# Altium PCB BEAR4.PcbDoc (part 3 of 3)
Units mm, origin at the board's own origin, x right, y up, seen from the top; angles counter-clockwise.
Board outline 83.43 x 40.25 mm, 4 copper layers (Top Layer, Layer 1, Layer 2, Bottom Layer), stack 0.8 mm thick; 156 components, 110 nets, 501 pads, 382 vias.
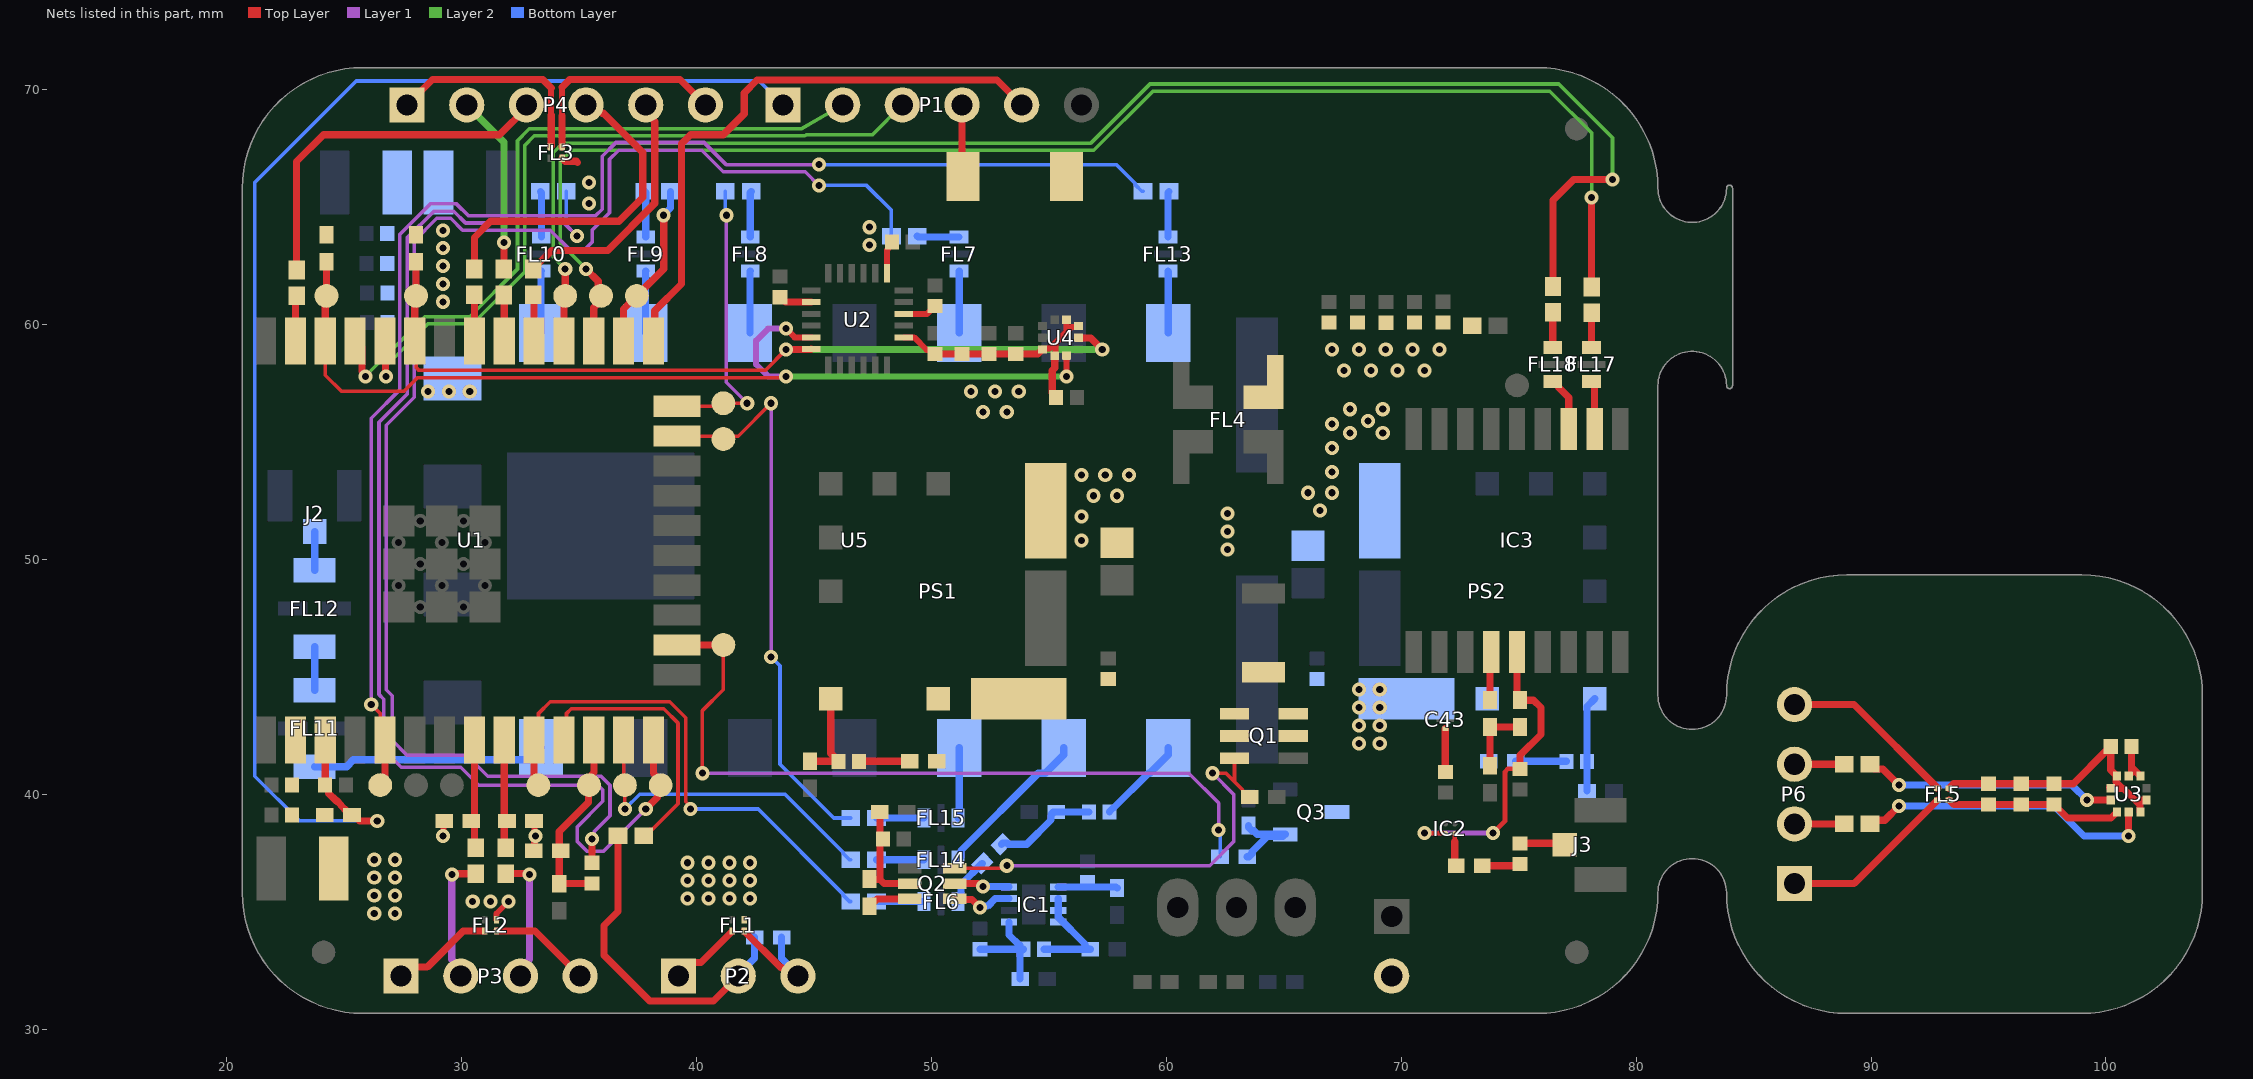
[diagram p4: the nets of this part, all layers, seen from the top]

## Via types
v1: diameter 0.6, hole 0.3, Top Layer to Bottom Layer, tented both sides, 382 vias

## Nets (pads, with @x,y where several pads share a name; then routed paths per layer and width w, separated by ;. In a path a pad name is that pad's centre, name@x,y a point inside that pad or via, vN(x,y) a via of type N, cw(c..) or ccw(c..) an arc to the next point about the centre after c; other vN are vias at no path point) (continued)
HEATER: R10.1 TP13.1 U1.16 | length 32.6
  Top Layer w0.152: v1(40.259,40.894) 40.259,43.561 41.148,44.45 TP13.1@41.148,46.355
  Top Layer w0.305: U1.16@39.174,46.355 TP13.1@41.148,46.355
  Layer 1 w0.152: v1(40.259,40.894) 60.96,40.894 62.23,39.624 v1(62.23,38.481)
  Bottom Layer w0.152: v1(62.23,38.481) 62.29,38.421 R10.1@62.29,37.338
I2C2_SCL: FB3.1 R26.1 U1.9 | length 4.6
  Top Layer w0.305: FB3.1@31.824,37.719 U1.9@31.824,42.3
I2C2_SCL_FILT: FB3.2 P3.3 | length 5.5
  Top Layer w0.305: FB3.2@31.877,36.619 32.85,36.619 v1(32.893,36.576)
  Layer 1 w0.305: P3.3@32.512,32.258 32.512,32.581 32.893,32.962 v1(32.893,36.576)
I2C2_SDA: FB2.1 R25.1 U1.8 | length 4.6
  Top Layer w0.305: FB2.1@30.554,37.718 U1.8@30.554,42.3
I2C2_SDA_FILT: FB2.2 P3.2 | length 5.5
  Top Layer w0.305: v1(29.591,36.576) 29.633,36.618 FB2.2@30.608,36.618
  Layer 1 w0.305: v1(29.591,36.576) 29.591,32.962 29.972,32.581 P3.2@29.972,32.258
I2C_SCL: R2.1 TP15.1 U1.36 U2.23 U4.2 | length 43
  Top Layer w0.152: U1.36@24.204,59.3 24.204,57.838 24.892,57.15 27.559,57.15 28.143,57.734 43.764,57.734 v1(43.815,57.785)
  Top Layer w0.254: v1(43.815,59.817) 44.184,59.448 U2.23@44.893,59.448 ; v1(55.753,57.785) U4.2@55.753,58.668
  Top Layer w0.305: U1.36@24.204,59.3 24.204,61.161 TP15.1@24.257,61.214 R2.1@24.257,62.671
  Layer 1 w0.254: v1(43.815,57.785) 43.053,57.785 42.545,58.293 42.545,59.309 43.053,59.817 v1(43.815,59.817)
  Layer 2 w0.254: v1(43.815,57.785) v1(55.753,57.785)
I2C_SDA: R1.1 TP14.1 U1.33 U2.24 U4.4 | length 36.5
  Top Layer w0.152: U1.33@28.014,59.3 28.072,59.242 28.072,58.161 28.194,58.039 42.926,58.039 v1(43.815,58.928)
  Top Layer w0.305: U1.33@28.014,59.3 28.014,61.161 TP14.1@28.067,61.214 R1.1@28.067,62.671 ; v1(43.815,58.928) 44.873,58.928 U2.24@44.893,58.948 ; U4.4@56.268,59.433 56.288,59.413 56.792,59.413 v1(57.277,58.928)
  Layer 2 w0.305: v1(43.815,58.928) v1(57.277,58.928)
LNA_EN: IC3.13 R22.2 | length 2.1
  Top Layer w0.305: R22.2@73.787,44.009 73.787,46.007 IC3.13@73.83,46.05
LNA_VCC: C41.2 IC2.A1 IC3.14 R23.1 | length 13.4
  Top Layer w0.203: v1(70.993,38.354) 71.012,38.335 IC2.A1@71.882,38.335 ; v1(73.914,38.354) 74.422,38.862 74.422,40.961 74.541,41.08 C41.2@75.057,41.08
  Top Layer w0.305: IC3.14@74.93,46.05 74.93,44.085 75.016,43.998 75.636,43.998 75.946,43.688 75.946,42.545 75.057,41.656 C41.2@75.057,41.08
  Layer 1 w0.203: v1(70.993,38.354) v1(73.914,38.354)
NetC6_1: C6.1 IC1.1 R6.1 | length 2.5
  Bottom Layer w0.305: IC1.1@55.406,36.056 57.864,36.056 R6.1@57.912,36.008
NetC7_1: C7.1 C9.2 IC1.5 R11.2 | length 4.4
  Bottom Layer w0.305: C9.2@52.07,33.401 C7.1@53.916,33.401 53.781,33.266 R11.2@53.781,32.131 ; IC1.5@53.306,34.556 53.306,34.011 53.748,33.569 C7.1@53.768,33.569
NetC7_2: C7.2 IC1.2 IC1.3 IC1.4 R7.2 | length 4.7
  Bottom Layer w0.305: C7.2@54.796,33.401 R7.2@56.694,33.401 ; IC1.2@55.406,35.556 IC1.3@55.406,35.056 55.406,34.764 56.546,33.624 56.546,33.549 R7.2@56.694,33.401 ; R7.2@56.769,33.401 R7.2@56.694,33.401
NetC8_2: C8.2 Q2.2 R9.1 R12.1 | length 4.6
  Top Layer w0.305: R9.1@47.386,36.374 47.812,36.374 ; R12.1@47.812,39.243 47.812,36.374 ; Q2.2@49.088,36.195 47.991,36.195 47.812,36.374
NetC12_1: C12.1 R15.2 | length 2.2
  Top Layer w0.305: C12.1@46.922,41.402 R15.2@49.082,41.402
NetC12_2: C12.2 PS1.6 R13.2 | length 4
  Top Layer w0.305: R13.2@44.831,41.402 C12.2@46.042,41.402 46.042,41.422 45.717,41.747 PS1.6@45.717,44.066
NetC15_1: C15.1 R21.2 | length 2.2
  Bottom Layer w0.305: R21.2@74.87,41.402 C15.1@77.03,41.402
NetC15_2: C15.2 PS2.6 R20.1 | length 4.1
  Bottom Layer w0.305: R20.1@77.911,40.132 77.911,41.401 C15.2@77.91,41.402 77.91,43.74 PS2.6@78.238,44.068
NetC22_2: C22.2 U2.10 | length 1.5
  Top Layer w0.254: U2.10@48.833,60.448 49.823,60.448 49.972,60.597 49.972,60.601 50.145,60.774 C22.2@50.165,60.774
NetC23_2: C23.2 U2.20 | length 1.4
  Top Layer w0.305: C23.2@43.561,61.155 43.581,61.155 43.788,60.948 U2.20@44.893,60.948
NetC34_1: C34.1 U5.18 | length 3.8
  Bottom Layer w0.305: C34.1@57.59,39.243 57.59,39.263 57.738,39.411 57.758,39.411 59.239,40.892 59.298,40.892 60.086,41.68 U5.18@60.086,41.975
NetC34_2: C34.2 R28.2 R29.2 | length 4.5
  Bottom Layer w0.305: R28.2@52.985,37.872 53.038,37.925 53.246,37.925 53.299,37.872 54.061,37.872 55.089,38.9 55.089,39.095 55.237,39.243 R29.2@55.312,39.243 C34.2@56.71,39.243 ; R29.2@55.118,39.183 R29.2@55.178,39.243
NetC40_1: C40.1 J3.1 | length 1.9
  Top Layer w0.318: C40.1@75.057,37.905 76.902,37.905 J3.1@76.961,37.846
NetC40_2: C40.2 L1.2 | length 1.6
  Top Layer w0.318: L1.2@73.448,36.957 74.989,36.957 C40.2@75.057,37.025
NetC42_1: C42.1 C43.1 | length 1.8
  Top Layer w0.318: C42.1@71.882,40.953 C43.1@71.882,42.785
NetF1_1: F1.1 Q1.1 Q1.2 Q1.5 Q1.6
NetFL1_1: FL1.1 P2.1 | length 3.1
  Top Layer w0.305: P2.1@39.243,32.258 39.826,32.841 40.197,32.841 FL1.1@41.533,34.177
NetFL1_2: FL1.2 P2.3 R5.1 | length 5
  Top Layer w0.305: FL1.2@42.033,34.177 43.589,32.621 43.636,32.621 44,32.258 P2.3@44.323,32.258
  Bottom Layer w0.305: R5.1@43.628,33.909 43.628,33.018 44.323,32.323 P2.3@44.323,32.258
NetFL2_1: FL2.1 P3.1 | length 4.4
  Top Layer w0.305: P3.1@27.432,32.258 27.813,32.639 28.541,32.639 30.079,34.177 FL2.1@30.992,34.177
NetFL2_2: FL2.2 P3.4 | length 4.4
  Top Layer w0.305: FL2.2@31.492,34.177 33.133,34.177 P3.4@35.052,32.258
NetFL3_1: FL3.1 P4.6 | length 9.2
  Top Layer w0.254: 34.278,68.878 34.278,69.282 ; 34.278,69.283 ccw(c34.024,69.282) 34.278,69.295 cw(c35.306,69.342) 34.278,69.391 ccw(c34.024,69.402) 34.278,69.402 34.278,70.092
  Top Layer w0.305: FL3.1@34.278,67.558 34.278,68.878 ; 34.278,70.092 34.611,70.425 39.303,70.425 39.392,70.336 P4.6@40.386,69.342
NetFL3_2: FL3.2 P4.1 | length 9.3
  Top Layer w0.254: 33.821,68.905 33.821,70.065
  Top Layer w0.305: P4.1@27.686,69.342 28.769,70.425 33.461,70.425 33.821,70.065 ; FL3.2@33.786,67.55 33.821,67.585 33.821,68.905
NetFL5_1: FL5.1 P6.4 | length 7.6
  Top Layer w0.305: P6.4@86.741,43.815 89.273,43.815 FL5.1@92.837,40.251
NetFL5_2: FL5.2 P6.1 | length 7.6
  Top Layer w0.305: P6.1@86.741,36.195 89.281,36.195 FL5.2@92.837,39.751
NetFL11_1: FL11.1 U5.12 | length 10
  Bottom Layer w0.318: FL11.1@23.749,41.174 25.116,41.174 25.401,41.459 32.87,41.459 U5.12@33.386,41.975
NetFL11_3: FL11.3 FL12.1 | length 1.9
  Bottom Layer w0.318: FL11.3@23.749,44.424 FL12.1@23.749,46.28
NetFL12_3: FL12.3 J2.1 | length 1.7
  Bottom Layer w0.318: FL12.3@23.749,49.53 J2.1@23.749,51.181
NetIC1_7: IC1.7 Q2.4 | length 2.6
  Top Layer w0.305: Q2.4@50.988,35.545 51.011,35.522 51.727,35.522 v1(52.07,35.179)
  Bottom Layer w0.305: v1(52.07,35.179) 52.126,35.235 52.398,35.235 52.718,35.556 IC1.7@53.306,35.556
NetIC1_8: IC1.8 Q2.5 | length 2.4
  Top Layer w0.305: Q2.5@50.988,36.195 51.99,36.195 52.117,36.068 v1(52.197,36.068)
  Bottom Layer w0.305: v1(52.197,36.068) 53.006,36.068 53.016,36.058 53.304,36.058 IC1.8@53.306,36.056
NetIC2_B1: IC2.B1 L1.1 | length 1.4
  Top Layer w0.203: 72.282,37.973 IC2.B1@72.282,38.335
  Top Layer w0.318: 72.282,37.973 72.282,37.023 L1.1@72.348,36.957
NetP5_2: P5.2 Q3.3
NetQ1_3: Q1.3 Q2.6 R8.2 | length 18.7
  Top Layer w0.152: Q2.6@50.988,36.845 52.98,36.845 53.092,36.957 v1(53.213,36.957) ; v1(61.976,40.894) 62.544,40.894 62.905,40.533 ; Q1.3@62.905,41.529 62.905,40.533 ; R8.2@63.56,39.878 63.485,39.878 63.261,40.102 63.261,40.177 62.905,40.533
  Layer 1 w0.152: v1(53.213,36.957) 61.849,36.957 62.865,37.973 62.865,40.005 v1(61.976,40.894)
NetQ2_3: Q2.3 R9.2 | length 1.9
  Top Layer w0.305: R9.2@47.371,35.239 47.371,35.314 47.519,35.462 47.614,35.462 47.697,35.545 Q2.3@49.088,35.545
NetQ3_1: Q3.1 R10.2 R14.1 | length 3.8
  Bottom Layer w0.305: R10.2@63.44,37.338 63.515,37.338 63.663,37.486 63.663,37.561 64.3,38.198 64.972,38.198 Q3.1@65.067,38.293 63.875,38.293 63.723,38.445 63.648,38.445 63.5,38.593 R14.1@63.5,38.668
NetR22_1: R22.1 R23.2 R24.2 | length 2.9
  Top Layer w0.305: R24.2@73.787,41.215 R22.1@73.787,42.859 R23.2@75.057,42.859
ONEWIRE: FB1.1 U1.11 | length 11.7
  Top Layer w0.152: U1.11@34.364,42.3 34.473,42.409 34.473,43.439 34.671,43.637 38.61,43.637 39.218,43.03 39.218,39.599 38.12,38.501 38.035,38.501 FB1.1@37.761,38.227
ONEWIRE_FILT: FB1.2 P2.2 R5.2 | length 14.2
  Top Layer w0.305: 36.067,34.164 36.067,34.416 36.661,35.01 FB1.2@36.661,38.227 ; 36.068,34.163 36.068,33.147 38.012,31.203 40.728,31.203 P2.2@41.783,32.258
  Bottom Layer w0.305: P2.2@41.783,32.258 41.783,32.323 42.478,33.018 R5.2@42.478,33.909
PGM_DTR: P1.5 U1.25 | length 25.4
  Top Layer w0.305: U1.25@38.174,59.3 38.227,59.353 38.227,60.579 39.37,61.722 39.37,67.691 39.751,68.072 41.148,68.072 42.037,68.961 42.037,69.85 42.584,70.397 52.793,70.397 P1.5@53.848,69.342
PGM_RTS: C5.2 P1.1 R27.2 U1.3 | length 60.9
  Top Layer w0.305: U1.3@24.204,42.3 24.204,40.392 C5.2@24.198,40.386 24.346,40.238 24.346,40.043 24.668,39.721 24.691,39.721 24.87,39.542 24.87,39.519 25.117,39.272 25.117,39.264 25.265,39.116 25.415,39.116 25.669,38.862 v1(26.416,38.862)
  Bottom Layer w0.152: v1(26.416,38.862) 23.114,38.862 21.209,40.767 21.209,66.04 25.527,70.358 42.672,70.358 P1.1@43.688,69.342
PGM_RX: P1.3 U1.34 | length 31.7
  Top Layer w0.305: U1.34@26.744,59.3 26.769,59.275 26.769,57.813 v1(26.797,57.785)
  Layer 2 w0.152: v1(26.797,57.785) 26.797,58.243 28.574,60.02 30.479,60.02 32.69,62.231 32.69,67.615 33.096,68.021 44.622,68.021 44.672,68.072 47.498,68.072 P1.3@48.768,69.342
PGM_TX: P1.2 U1.35 | length 29.9
  Top Layer w0.305: U1.35@25.474,59.3 25.772,59.002 25.772,58.001 25.908,57.865 v1(25.908,57.785)
  Layer 2 w0.152: v1(25.908,57.785) 28.448,60.325 30.353,60.325 32.385,62.357 32.385,67.818 32.848,68.281 32.893,68.326 44.468,68.326 P1.2@46.228,69.342
RAD_3V3: C14.2 C28.2 C29.2 C30.2 C31.2 C32.1 C33.1 PS2.4 PS2.5 R21.1 U5.8
  other v1: 68.199,42.164 69.088,42.164 68.199,42.926 69.088,42.926 68.199,43.688 69.088,43.688 68.199,44.45 69.088,44.45 28.575,57.15 29.464,57.15 30.353,57.15 29.21,60.96 29.21,61.722 29.21,62.484 29.21,63.246 29.21,63.987
RAD_EN: FB13.1 TP2.1 U1.26 | length 7.2
  Top Layer w0.305: U1.26@36.904,59.3 36.904,60.653 TP2.1@37.465,61.214 38.608,62.357 v1(38.608,64.643)
  Bottom Layer w0.305: v1(38.608,64.643) 38.608,64.662 38.904,64.958 FB13.1@38.904,65.659
RAD_EN_FILT: FB13.2 FL9.1 | length 2
  Bottom Layer w0.305: FB13.2@37.804,65.659 37.846,65.617 FL9.1@37.846,63.717
RAD_EN_FILT2: FL9.3 U5.6 | length 2.6
  Bottom Layer w0.305: U5.6@37.836,59.625 37.836,62.257 FL9.3@37.846,62.267
RAD_PTT: FB12.1 TP1.1 U1.24 | length 12.4
  Top Layer w0.152: U1.24@39.174,56.515 41.021,56.515 TP1.1@41.148,56.642 v1(42.164,56.642)
  Layer 1 w0.152: v1(41.275,64.643) 41.275,57.531 v1(42.164,56.642)
  Bottom Layer w0.152: FB12.1@41.233,65.659 41.233,64.685 v1(41.275,64.643)
RAD_PTT_FILT: FB12.2 FL8.1 | length 2
  Bottom Layer w0.305: FL8.1@42.291,63.717 42.291,65.617 FB12.2@42.333,65.659
RAD_PTT_FILT2: FL8.3 U5.5 | length 2.6
  Bottom Layer w0.305: U5.5@42.286,59.625 42.286,62.262 FL8.3@42.291,62.267
RAD_PW: FB14.1 TP3.1 U1.14 | length 52.5
  Top Layer w0.305: v1(37.846,39.37) 38.345,39.869 38.345,40.25 TP3.1@38.481,40.386 38.481,40.578 38.174,40.885 U1.14@38.174,42.3
  Layer 1 w0.152: v1(34.925,63.754) 34.366,64.313 30.175,64.313 29.667,64.821 28.83,64.821 27.686,63.677 27.686,57.023 26.492,55.829 26.492,44.247 26.691,44.048 26.691,41.889 27.432,41.148 29.972,41.148 30.734,40.386 35.814,40.386 36.017,40.183 36.017,39.7 34.925,38.608 34.925,37.987 35.341,37.571 36.047,37.571 v1(37.846,39.37)
  Bottom Layer w0.152: FB14.1@34.459,65.659 34.459,64.22 v1(34.925,63.754)
RAD_PW_FILT: FB14.2 FL10.1 | length 2
  Bottom Layer w0.305: FB14.2@33.359,65.659 33.401,65.617 FL10.1@33.401,63.717
RAD_PW_FILT2: FL10.3 U5.7 | length 2.6
  Bottom Layer w0.305: U5.7@33.386,59.625 33.386,62.252 FL10.3@33.401,62.267
RAD_SQL: FB15.1 TP4.1 U1.5 | length 60.2
  Top Layer w0.152: v1(26.162,43.815) 26.538,43.439 26.538,42.506 U1.5@26.744,42.3
  Top Layer w0.305: TP4.1@26.543,40.386 26.543,40.578 26.744,40.779 U1.5@26.744,42.3
  Layer 1 w0.152: v1(26.162,43.815) 26.162,56.007 27.381,57.226 27.381,63.83 28.677,65.126 29.793,65.126 30.301,64.618 35.708,64.618 35.997,64.906 35.997,67.162 36.577,67.742 40.325,67.742 41.265,66.802 v1(45.212,66.802)
  Bottom Layer w0.152: v1(45.212,66.802) 57.87,66.802 58.689,65.983 58.689,65.933 58.963,65.659 FB15.1@59.013,65.659
RAD_SQL_FILT: FB15.2 FL13.1 | length 2
  Bottom Layer w0.305: FL13.1@60.071,63.717 60.071,65.617 FB15.2@60.113,65.659
RAD_SQL_FILT2: FL13.3 U5.1 | length 2.6
  Bottom Layer w0.305: FL13.3@60.071,62.267 60.086,62.252 U5.1@60.086,59.625
RAW_PWR: D1.2 P1.4 | length 3.1
  Top Layer w0.305: P1.4@51.308,69.342 51.308,66.339 D1.2@51.353,66.294
REM_GND: C18.1 C19.1 C24.1 C25.1 FL5.3 U3.3 U3.8 U3.9 | length 9.5
  Top Layer w0.305: FL5.3@93.317,39.751 93.503,39.565 C18.1@94.996,39.565 C19.1@96.393,39.565 C24.1@97.79,39.565 97.81,39.565 97.958,39.417 97.958,39.397 98.366,38.989 100.214,38.989 100.427,39.202 100.442,39.202 100.465,39.225 U3.3@100.465,39.24 ; U3.9@100.965,40.77 100.965,40.785 101.083,40.903 101.083,41.152 ; C25.1@101.083,42.037 101.083,41.152 ; U3.8@101.465,40.77 101.465,40.785 101.442,40.808 101.427,40.808 101.083,41.152
REM_I2C2_SCL: FB8.1 P6.3 | length 2.1
  Top Layer w0.305: P6.3@86.741,41.275 FB8.1@88.858,41.275
REM_I2C2_SCL_FILT: FB8.2 U3.2 | length 10.9
  Top Layer w0.305: FB8.2@89.958,41.275 90.156,41.077 90.495,41.077 v1(91.186,40.386) ; v1(99.187,39.751) 100.196,39.751 U3.2@100.2,39.755
  Bottom Layer w0.305: v1(91.186,40.386) 98.552,40.386 v1(99.187,39.751)
REM_I2C2_SDA: FB9.1 P6.2 | length 2.1
  Top Layer w0.305: P6.2@86.741,38.735 FB9.1@88.858,38.735
REM_I2C2_SDA_FILT: FB9.2 U3.4 | length 12.9
  Top Layer w0.305: FB9.2@89.958,38.735 90.118,38.895 90.584,38.895 v1(91.186,39.497) ; v1(100.965,38.227) U3.4@100.965,39.24
  Bottom Layer w0.305: v1(91.186,39.497) 97.79,39.497 99.06,38.227 v1(100.965,38.227)
REM_VCC_3V3: C18.2 C19.2 C24.2 C25.2 FL5.4 U3.1 U3.5 U3.6 U3.10 | length 11.8
  Top Layer w0.305: FL5.4@93.317,40.251 93.511,40.445 C18.2@94.996,40.445 C19.2@96.393,40.445 C24.2@97.79,40.445 98.611,40.445 100.035,41.869 C25.2@100.055,41.869 ; U3.1@100.162,40.293 U3.1@100.2,40.255 100.205,40.25 100.698,40.25 ; C25.2@100.203,42.037 100.203,41.032 100.427,40.808 100.427,40.521 100.698,40.25 ; U3.5@101.465,39.24 101.445,39.26 101.445,39.547 101.237,39.755 ; U3.6@101.73,39.755 101.237,39.755 ; 100.698,40.25 100.742,40.25 101.237,39.755
RX_AUD: C4.1 FB11.1 | length 62.4
  Top Layer w0.305: C4.1@35.56,37.084 v1(35.56,38.1)
  Layer 1 w0.152: v1(35.56,38.1) 35.646,38.186 35.646,38.407 36.322,39.084 36.322,40.386 35.941,40.767 31.115,40.767 30.226,41.656 27.686,41.656 27.051,42.291 27.051,44.196 26.797,44.45 26.797,55.703 27.991,56.897 27.991,63.551 28.956,64.516 29.541,64.516 30.049,64.008 33.782,64.008 34.671,63.119 35.179,63.119 35.56,63.5 35.56,64.008 36.301,64.749 36.301,67.021 36.692,67.412 40.224,67.412 41.138,66.497 44.628,66.497 v1(45.212,65.913)
  Bottom Layer w0.152: v1(45.212,65.913) 47.244,65.913 48.303,64.854 FB11.1@48.303,63.754
RX_AUD_AC: C4.2 R3.1 R4.2 TP12.1 U1.12 | length 8.1
  Top Layer w0.305: TP12.1@35.406,40.359 35.406,39.658 34.163,38.416 34.163,37.592 R4.2@34.163,36.195 34.172,36.204 C4.2@35.56,36.204 ; TP12.1@35.433,40.386 35.569,40.522 35.569,40.842 35.648,40.92 U1.12@35.648,42.286
RX_AUD_FILT: FB11.2 FL7.1 | length 1.8
  Bottom Layer w0.305: FB11.2@49.403,63.754 49.44,63.717 FL7.1@51.181,63.717
RX_AUD_FILT2: FL7.3 U5.3 | length 2.6
  Bottom Layer w0.305: FL7.3@51.181,62.267 51.186,62.262 U5.3@51.186,59.625
SUART_RX: FB16.1 TP5.1 U1.13 | length 14
  Top Layer w0.152: U1.13@36.904,42.3 36.904,40.439 TP5.1@36.957,40.386 v1(36.957,39.37)
  Bottom Layer w0.152: v1(36.957,39.37) 37.592,40.005 43.773,40.005 46.243,37.535 46.243,37.485 46.517,37.211 FB16.1@46.567,37.211
SUART_RX_FILT: FB16.2 FL14.1 | length 2
  Bottom Layer w0.305: FB16.2@47.667,37.211 FL14.1@49.694,37.211
SUART_RX_FILT2: FL14.3 U5.17 | length 6.8
  Bottom Layer w0.305: FL14.3@51.144,37.211 51.267,37.334 51.267,37.606 54.553,40.892 54.848,40.892 55.636,41.68 U5.17@55.636,41.975
SUART_TX: FB17.1 TP6.1 U1.23 | length 24.2
  Top Layer w0.152: U1.23@39.174,55.245 41.021,55.245 TP6.1@41.148,55.118 41.272,55.242 41.78,55.242 v1(43.18,56.642)
  Layer 1 w0.152: v1(43.18,45.847) v1(43.18,56.642)
  Bottom Layer w0.152: v1(43.18,45.847) 43.561,45.466 43.561,41.275 45.847,38.989 FB17.1@46.567,38.989
SUART_TX_FILT: FB17.2 FL15.1 | length 2
  Bottom Layer w0.305: FB17.2@47.667,38.989 FL15.1@49.694,38.989
SUART_TX_FILT2: FL15.3 U5.16 | length 3
  Bottom Layer w0.305: FL15.3@51.144,38.989 51.186,39.031 U5.16@51.186,41.975
TX_AUD: FB10.1 TP11.1 U1.10 | length 22.4
  Top Layer w0.152: U1.10@33.094,42.3 33.279,42.485 33.279,43.439 33.782,43.942 38.862,43.942 39.548,43.256 39.548,39.683 39.751,39.48 v1(39.751,39.37)
  Top Layer w0.305: U1.10@33.094,42.3 33.094,40.758 33.274,40.578 TP11.1@33.274,40.386
  Bottom Layer w0.152: v1(39.751,39.37) 42.63,39.37 46.243,35.757 46.243,35.707 46.517,35.433 FB10.1@46.567,35.433
TX_AUD_FILT: FB10.2 FL6.1 | length 2
  Bottom Layer w0.305: FB10.2@47.667,35.433 FL6.1@49.694,35.433
TX_AUD_FILT2: FL6.3 R28.1 | length 2.1
  Bottom Layer w0.305: FL6.3@51.144,35.433 51.264,35.553 51.264,36.151 R28.1@52.171,37.058
UART2_RX: FB18.1 TP7.1 U1.27 | length 60.9
  Top Layer w0.305: v1(35.306,62.357) 35.827,61.836 35.827,61.328 TP7.1@35.941,61.214 35.941,61.022 35.634,60.715 U1.27@35.634,59.3 ; FB18.1@78.105,61.595 v1(78.105,65.405)
  Layer 2 w0.152: v1(35.306,62.357) 34.214,63.449 34.214,66.929 34.696,67.412 56.921,67.412 59.435,69.926 76.327,69.926 78.105,68.148 v1(78.105,65.405)
UART2_RX_FILT: FB18.2 FL17.1 | length 1.5
  Top Layer w0.305: FL17.1@78.105,59.018 FB18.2@78.105,60.495
UART2_RX_FILT2: FL17.3 IC3.2 | length 2.1
  Top Layer w0.305: FL17.3@78.105,57.568 78.107,57.568 78.23,57.445 IC3.2@78.23,55.55
UART2_TX: FB19.1 TP8.1 U1.28 | length 63.8
  Top Layer w0.305: U1.28@34.364,59.3 34.364,61.161 TP8.1@34.417,61.214 v1(34.417,62.357) ; FB19.1@76.462,61.611 76.462,65.286 77.343,66.167 v1(78.994,66.167)
  Layer 2 w0.152: v1(34.417,62.357) 33.909,62.865 33.909,67.31 34.315,67.716 56.794,67.716 59.309,70.231 76.708,70.231 78.994,67.945 v1(78.994,66.167)
UART2_TX_FILT: FB19.2 FL18.1 | length 1.5
  Top Layer w0.305: FL18.1@76.454,59.018 76.454,60.504 FB19.2@76.462,60.511
UART2_TX_FILT2: FL18.3 IC3.3 | length 2.4
  Top Layer w0.305: FL18.3@76.454,57.568 76.579,57.568 76.702,57.445 76.702,57.32 77.13,56.892 IC3.3@77.13,55.55
VBATT: C10.2 C13.2 D1.1 FL4.2 FL4.6 PS1.2 PS2.2
  other v1: 62.611,50.419 56.388,50.8 62.611,51.181 56.388,51.816 62.611,51.943 66.548,52.07 56.896,52.705 57.912,52.705 66.04,52.832 67.056,52.832 56.388,53.594 57.404,53.594 58.42,53.594 67.056,53.721 67.056,54.737 67.818,55.372 69.215,55.372 67.056,55.753 68.58,55.88 67.818,56.388 69.215,56.388
VCC_3V3: C1.2 C2.2 C3.1 C11.2 C16.2 C17.2 C20.2 C21.2 C26.2 C27.2 C35.2 C36.2 C37.2 C38.2 C39.2 FB20.1 FL1.3 FL2.3 FL3.4 PS1.4 PS1.5 R1.2 R2.2 R3.2 R15.1 R25.2 R26.2 R27.1 U1.2 U2.8 U2.13 U4.1 U4.5 U4.6 U4.10 | length 16.9
  Top Layer w0.254: v1(29.21,38.227) 29.24,38.257 29.24,38.832 R25.2@29.27,38.862 ; FL2.3@31.492,34.657 31.492,34.921 v1(32.004,35.433) ; R26.2@33.087,38.862 33.117,38.832 33.117,38.257 v1(33.147,38.227) ; U2.13@48.113,62.168 48.113,63.158 48.155,63.2 48.155,63.327 C21.2@48.328,63.5 ; U2.8@48.833,59.448 48.836,59.445 49.267,59.445 49.797,58.915 49.992,58.915 C20.2@50.165,58.742 ; U4.10@54.738,58.933 54.784,58.979 55.035,58.979 55.75,59.694 55.75,60.195 U4.6@55.753,60.198 ; U4.1@55.253,58.668 55.284,58.699 55.284,59.2 55.971,59.887 56.222,59.887 U4.5@56.268,59.933
  Top Layer w0.305: R3.2@33.08,37.592 33.113,37.626 33.113,38.193 v1(33.147,38.227) ; FL3.4@34.286,67.07 34.417,66.939 34.884,66.939 34.941,66.883 ; C20.2@50.165,58.742 C17.2@51.308,58.742 C16.2@52.451,58.742 C27.2@53.594,58.742 54.532,58.742 54.723,58.933 U4.10@54.738,58.933 ; U4.1@55.253,58.668 55.253,58.14 55.148,58.036 55.148,57.081 55.313,56.916 C26.2@55.313,56.896
  other v1: 26.289,34.925 27.178,34.925 30.48,35.433 31.242,35.433 39.624,35.56 40.513,35.56 41.402,35.56 42.291,35.56 26.289,35.687 27.178,35.687 39.624,36.322 40.513,36.322 41.402,36.322 42.291,36.322 26.289,36.449 27.178,36.449 39.624,37.084 40.513,37.084 41.402,37.084 42.291,37.084 26.289,37.211 27.178,37.211 52.197,56.261 53.213,56.261 51.689,57.15 52.705,57.15 53.721,57.15 67.564,58.039 68.707,58.039 69.85,58.039 70.993,58.039 67.056,58.928 68.199,58.928 69.342,58.928 70.485,58.928 71.628,58.928 47.371,63.373 47.371,64.135 35.433,65.151 35.433,66.04
VSPI_CLK: FB4.1 U1.30 | length 2
  Top Layer w0.305: FB4.1@31.805,61.255 31.824,61.236 U1.30@31.824,59.3
VSPI_CLK_FILT: FB4.2 P4.2 | length 7.6
  Top Layer w0.305: FB4.2@31.805,62.355 v1(31.805,63.479)
  Layer 2 w0.305: P4.2@30.226,69.342 31.805,67.763 v1(31.805,63.479)
VSPI_CS0: FB7.1 U1.29 | length 2
  Top Layer w0.305: FB7.1@33.058,61.261 33.094,61.226 U1.29@33.094,59.3
VSPI_CS0_FILT: FB7.2 P4.5 | length 10.7
  Top Layer w0.305: FB7.2@33.058,62.361 33.058,62.411 33.256,62.609 33.306,62.609 33.847,63.149 36.225,63.149 38.227,65.151 38.227,68.638 37.846,69.019 P4.5@37.846,69.342
VSPI_MISO: FB6.1 U1.31 | length 2
  Top Layer w0.305: FB6.1@30.553,61.261 30.554,61.26 U1.31@30.554,59.3
VSPI_MISO_FILT: FB6.2 P4.4 | length 14.4
  Top Layer w0.305: FB6.2@30.553,62.361 30.553,63.7 31.242,64.389 36.703,64.389 37.719,65.405 37.719,67.31 36.045,68.984 35.988,68.984 35.629,69.342 P4.4@35.306,69.342
VSPI_MOSI: FB5.1 U1.37 | length 1.9
  Top Layer w0.305: U1.37@22.934,59.3 22.934,61.164 FB5.1@22.984,61.214
VSPI_MOSI_FILT: FB5.2 P4.3 | length 15.5
  Top Layer w0.305: FB5.2@22.984,62.314 22.984,66.926 24.13,68.072 31.623,68.072 32.766,69.215 P4.3@32.766,69.342
pads on no net: FM1.FD0 FM2.FD0 FM3.FD0 FM4.FD0 FM5.FD0 FM6.FD0 IC3.5 IC3.9 IC3.15 IC3.16 IC3.17 IC3.18 PS1.1 PS1.8 PS1.9 PS1.10 PS2.1 PS2.8 PS2.9 PS2.10 U1.4 U1.17 U1.18 U1.19 U1.20 U1.21 U1.22 U1.32 U2.2 U2.3 U2.4 U2.5 U2.6 U2.7 U2.12 U2.14 U2.15 U2.16 U2.17 U2.19 U2.21 U2.22 U3.7 U4.7 U5.2 U5.4 U5.13 U5.14 U5.15

## Polygon pours and split planes (outlines as drawn)
GND on Top Layer "GND_L01_P060" (solid, remove dead copper, pour order 60): 21.209,66.167 25.527,70.485 74.676,70.485 75.565,69.596 75.565,67.31 76.327,66.548 79.502,66.548 80.137,65.913 80.137,35.941 79.502,35.306 76.327,35.306 75.438,34.417 75.438,31.75 74.803,31.115 26.289,31.115 25.908,31.496 25.908,34.544 25.273,35.179 23.241,35.179 22.225,34.163 21.717,34.163 21.209,34.671
VCC_3V3 on Top Layer "VCC_3V3_L01_P002" (solid, pour order 2): 23.622,35.56 24.003,35.179 25.273,35.179 26.162,34.29 27.559,34.29 27.94,34.671 27.94,37.973 27.559,38.354 25.4,38.354 23.495,40.259 23.495,43.561 23.241,43.815 22.733,43.815 22.479,43.561 22.479,38.735 22.86,38.354 23.241,38.354 23.622,37.973
GND on Top Layer "GND_L01_P051" (solid, pour order 51): 59.69,56.388 59.055,55.753 59.055,55.118 58.547,54.61 57.15,54.61 56.007,55.753 56.007,56.947 56.341,57.28 56.341,57.865 56.769,58.293 57.531,58.293 57.912,58.674 57.912,59.563 58.42,60.071 65.405,60.071 65.659,59.817 65.659,59.309 65.278,58.928 62.611,58.928 61.976,58.293 61.976,56.388
GND on Top Layer "GND_L01_P042" (solid, pour order 42): 69.977,45.212 70.231,44.958 70.866,44.958 71.12,45.212 71.12,47.117 71.247,47.244 72.009,47.244 72.136,47.117 72.136,45.085 72.263,44.958 73.152,44.958 73.279,45.085 73.279,47.117 73.406,47.244 79.756,47.244 80.137,47.625 80.137,56.388 79.883,56.642 78.867,56.642 78.74,56.515 78.74,54.483 78.613,54.356 70.231,54.356 69.977,54.102
GND on Top Layer "GND_L01_P001" (solid, pour order 1): 22.86,34.798 22.225,34.163 21.717,34.163 21.209,34.671 21.209,60.706 21.463,60.96 21.844,60.96 22.098,60.706 22.098,57.912 22.606,57.404 36.576,57.404 37.211,56.769 37.211,45.974 37.592,45.593 40.386,45.593 40.64,45.339 40.64,44.958 40.386,44.704 37.719,44.704 37.338,44.323 22.479,44.323 22.098,43.942 22.098,41.021 22.225,40.894 22.225,38.608 22.86,37.973
VBATT on Top Layer "Top Layer-VBATT" (solid, remove dead copper, pour order 0): 63.246,56.388 63.5,56.134 65.151,56.134 65.532,55.753 65.532,52.197 66.167,51.562 66.929,51.562 67.564,52.197 67.564,54.229 68.072,54.737 69.342,54.737 69.723,55.118 69.723,56.388 69.215,56.896 66.802,56.896 65.151,58.547 65.151,66.929 64.77,67.31 55.118,67.31 55.118,65.278 62.865,65.278 63.246,64.897 63.246,58.293
VBATT on Top Layer "VBATT_L01_P058" (solid, pour order 58): 54.102,50.038 53.975,50.165 53.975,54.102 58.801,54.102 59.055,53.848 59.055,50.546 58.547,50.038
GND on Top Layer "GND_L01_P054" (solid, pour order 54): 53.975,49.53 56.388,49.53 56.642,49.784 58.801,49.784 59.055,49.53 59.055,45.974 58.547,45.466 53.975,45.466
BATT_GND on Top Layer "BATT_GND_L01_P050" (solid, pour order 50): 61.976,55.626 62.103,55.499 62.103,45.212 61.341,44.45 61.341,34.544 60.96,34.163 59.944,34.163 59.563,34.544 59.563,55.372 59.817,55.626
BATT_PROTECTED on Top Layer "BATT_PROTECTED_L01_P049" (solid, pour order 49): 63.246,55.499 63.373,55.626 64.897,55.626 65.024,55.499 65.024,49.022 67.691,46.355 67.691,42.037 68.834,40.894 68.834,37.084 70.358,35.56 70.358,33.909 70.231,33.782 66.929,33.782 66.675,34.036 66.675,41.148 66.421,41.402 66.421,44.831 65.024,46.228 63.5,46.228 63.246,46.482 63.246,55.118
BATT_C2 on Top Layer "BATT_C2_L01_P048" (solid, pour order 48): 64.516,41.91 65.405,41.91 66.421,40.894 66.421,34.544 66.04,34.163 64.77,34.163 64.262,34.671 64.262,41.656
NetF1_1 on Top Layer "NETF1_1_L01_P047" (solid, pour order 47): 63.246,45.593 62.23,44.577 62.23,42.291 62.357,42.164 65.913,42.164 66.04,42.291 66.04,44.577 65.024,45.593
VCC_3V3 on Top Layer "VCC_3V3_L01_P038" (solid, pour order 38): 46.863,63.373 46.863,64.135 47.244,64.516 48.387,64.516 48.641,64.262 48.641,63.119 48.387,62.865 47.371,62.865
VCC_3V3 on Top Layer "Top Layer-VCC_3V3" (solid, pour order 33): 29.083,64.516 35.941,64.516 36.322,64.897 36.322,67.31 35.941,67.691 24.257,67.691 23.749,67.183 23.749,63.754 24.003,63.5 28.067,63.5
RAW_PWR on Top Layer "RAW_PWR_L01_P046" (solid, pour order 46): 50.546,69.215 51.181,69.85 51.562,69.85 52.07,69.342 52.07,65.405 51.943,65.278 50.673,65.278 50.546,65.405 50.546,68.961
GPS_VCC_3V3_FILT on Top Layer "Top Layer-GPS_VCC_3V3_FILT" (solid, pour order 43): 71.12,54.61 71.247,54.483 74.168,54.483 74.295,54.61 74.295,58.928 74.549,59.182 74.549,60.325 74.422,60.452 73.914,60.452 73.787,60.325 73.787,59.69 71.12,57.023
VCC_3V3 on Top Layer "VCC_3V3_L01_P039" (solid, pour order 39): 66.802,60.452 66.548,60.198 66.548,57.785 67.056,57.277 70.993,57.277 73.406,59.69 73.406,60.325 73.279,60.452
VCC_3V3 on Top Layer "Top Layer-VCC_3V3 1" (solid, pour order 37): 49.911,41.021 50.038,40.894 51.308,40.894 51.689,41.275 51.689,42.418 52.451,43.18 56.896,43.18 58.166,44.45 58.166,44.958 57.912,45.212 53.721,45.212 53.34,45.593 53.34,54.483 53.975,55.118 54.864,55.118 55.499,55.753 55.499,57.023 55.245,57.277 55.245,57.785 53.975,59.055 49.911,59.055 49.403,58.547 49.403,57.912 51.181,56.134 51.181,49.784 49.149,47.752 42.926,47.752 42.291,47.117 42.291,44.45 41.275,43.434 41.275,40.386 38.989,38.1 38.989,34.671 39.37,34.29 41.91,34.29 44.577,36.957 44.577,44.45 45.212,45.085 46.355,45.085 46.863,44.577 46.863,42.926 47.371,42.418 49.53,42.418 49.911,42.037
GND on Top Layer "Top Layer-GND" (solid, pour order 30): 36.449,33.401 36.576,33.274 39.243,33.274 39.497,33.528 39.497,33.909 39.37,34.036 38.862,34.036 36.703,34.036 36.449,33.782
GND on Top Layer "Top Layer-GND 1" (solid, pour order 26): 25.908,33.401 26.035,33.274 28.575,33.274 28.956,33.655 28.956,34.671 28.504,34.219 28.321,34.036 26.162,34.036 25.908,33.782
VCC_3V3 on Top Layer "VCC_3V3_L01_P025" (solid, pour order 25): 30.353,36.068 30.099,35.814 30.099,35.306 30.353,35.052 31.229,35.052 31.492,34.789 31.492,34.675 31.623,34.544 32.258,34.544 32.512,34.798 32.512,35.814 32.258,36.068
REM_GND on Top Layer "REM_GND_L01_P021" (solid, pour order 21): 88.138,48.26 85.09,45.212 85.09,34.925 88.138,31.877 99.822,31.877 102.87,34.925 102.87,45.085 99.695,48.26
GND on Bottom Layer "GND_L04_P055" (solid, remove dead copper, pour order 55): 21.209,66.167 25.527,70.485 74.676,70.485 75.565,69.596 75.565,67.31 76.327,66.548 79.502,66.548 80.137,65.913 80.137,35.941 79.502,35.306 76.327,35.306 75.438,34.417 75.438,31.75 74.803,31.115 26.289,31.115 25.908,31.496 25.908,34.544 25.273,35.179 23.241,35.179 22.225,34.163 21.717,34.163 21.209,34.671
BATT_GND on Bottom Layer "BATT_GND_L04_P044" (solid, pour order 44): 53.848,34.798 53.848,37.592 54.737,38.481 57.531,38.481 59.563,40.513 65.278,40.513 65.659,40.132 65.659,39.751 65.278,39.37 61.976,39.37 61.341,38.735 61.341,34.544 60.96,34.163 60.198,34.163 59.69,34.671 59.69,36.322 59.182,36.83 55.372,36.83 54.864,36.322 54.864,35.306
GND on Bottom Layer "Bottom Layer-GND" (solid, pour order 12): 38.942,43.815 63.5,43.815 65.151,45.466 78.486,45.466 78.994,44.958 78.994,41.275 78.613,40.894 78.613,39.624 78.359,39.37 76.835,39.37 76.327,38.862 76.327,36.068 77.089,35.306 79.502,35.306 80.137,35.941 80.137,64.643 78.74,66.04 61.468,66.04 60.96,65.532 60.96,61.214 61.468,60.706 73.787,60.706 74.168,60.325 74.168,55.626 73.406,54.864 71.882,54.864 71.12,54.102 71.12,50.419 70.231,49.53 60.198,49.53 59.182,50.546 59.182,52.705 59.69,53.213 64.897,53.213 65.659,53.975 65.659,60.198 66.167,60.706 61.468,60.706 62.103,60.071 62.103,58.293 61.595,57.785 32.639,57.785 31.115,56.261 27.813,56.261 26.289,57.785 26.289,64.262 25.4,65.151 25.4,67.31 25.019,67.691 22.733,67.691 21.209,66.167 21.209,40.767 21.971,40.005 35.132,40.005
GND on Bottom Layer "GND_L04_P027" (solid, remove dead copper, pour order 27): 30.353,67.691 30.099,67.437 30.099,63.754 30.988,62.865 43.307,62.865 44.45,64.008 44.45,66.548 43.307,67.691
NetP5_2 on Bottom Layer "NETP5_2_L04_P045" (solid, pour order 45): 66.675,39.37 66.675,32.385 67.564,31.496 69.977,31.496 70.485,32.004 70.485,32.639 69.977,33.147 68.961,33.147 68.199,33.909 68.199,39.497 67.818,39.878 67.056,39.878
RAD_3V3 on Bottom Layer "RAD_3V3_L04_P013" (solid, pour order 13): 65.532,45.212 65.151,44.831 65.151,41.656 65.786,41.021 67.691,41.021 73.787,41.021 74.168,41.402 74.168,44.704 73.66,45.212 71.882,45.212
RAD_3V3 on Bottom Layer "RAD_3V3_L04_P004" (solid, pour order 4): 26.543,58.293 28.067,56.769 30.861,56.769 31.623,57.531 31.623,59.817 29.845,61.595 29.845,67.183 29.591,67.437 26.797,67.437 26.543,67.183
VBATT on Bottom Layer "VBATT_L04_P011" (solid, pour order 11): 60.833,50.038 60.071,50.8 60.071,51.689 60.833,52.451 65.278,52.451 66.548,53.721 66.548,56.007 67.437,56.896 69.85,56.896 70.485,56.261 70.485,50.673 69.85,50.038
REM_GND on Bottom Layer "REM_GND_L04_P003" (solid, pour order 3): 88.138,48.26 85.09,45.212 85.09,34.925 88.138,31.877 99.822,31.877 102.87,34.925 102.87,45.085 99.695,48.26
GND on Layer 1 "GND_L02_P056" (solid, remove dead copper, pour order 56): 21.209,66.167 25.527,70.485 74.676,70.485 75.565,69.596 75.565,67.31 76.327,66.548 79.502,66.548 80.137,65.913 80.137,35.941 79.502,35.306 76.327,35.306 75.438,34.417 75.438,31.75 74.803,31.115 26.289,31.115 25.908,31.496 25.908,34.544 25.273,35.179 23.241,35.179 22.225,34.163 21.717,34.163 21.209,34.671
VCC_3V3 on Layer 1 "Layer 1-VCC_3V3" (solid, pour order 19): 25.273,35.179 26.162,34.29 41.91,34.29 44.577,36.957 44.577,38.862 43.688,39.751 27.432,39.751 25.527,41.656 25.527,64.008 26.035,64.516 35.941,64.516 36.322,64.897 36.322,67.31 35.941,67.691 22.733,67.691 21.209,66.167 21.209,48.133 22.479,46.863 22.479,36.703 24.003,35.179
VBATT on Layer 1 "VBATT_L02_P053" (solid, pour order 53): 65.278,52.451 66.548,53.721 66.548,56.007 67.437,56.896 69.85,56.896 70.485,56.261 70.485,50.673 69.85,50.038 56.388,50.038 55.753,50.673 55.753,53.467 56.388,54.102 58.801,54.102 60.452,52.451 60.833,52.451
VCC_3V3 on Layer 1 "Layer 1-VCC_3V3 1" (solid, pour order 36): 51.435,55.499 53.34,55.499 54.356,56.515 54.356,60.071 55.245,60.96 66.04,60.96 66.548,60.452 66.548,57.785 67.056,57.277 71.755,57.277 72.263,57.785 72.263,62.23 71.501,62.992 52.705,62.992 51.181,64.516 47.244,64.516 46.863,64.135 46.863,63.373 47.371,62.865 50.419,62.865 51.181,62.103 51.181,55.753
RAD_3V3 on Layer 1 "RAD_3V3_L02_P031" (solid, pour order 31): 69.342,41.402 69.85,41.91 69.85,44.577 69.215,45.212 38.1,45.212 37.211,46.101 37.211,57.277 30.226,64.262 28.448,64.262 27.559,63.373 27.559,54.102 28.575,53.086 31.877,53.086 32.639,52.324 32.639,42.545 33.782,41.402 67.31,41.402
GND on Layer 2 "GND_L03_P057" (solid, remove dead copper, pour order 57): 21.209,66.167 25.527,70.485 74.676,70.485 75.565,69.596 75.565,67.31 76.327,66.548 79.502,66.548 80.137,65.913 80.137,35.941 79.502,35.306 76.327,35.306 75.438,34.417 75.438,31.75 74.803,31.115 26.289,31.115 25.908,31.496 25.908,34.544 25.273,35.179 23.241,35.179 22.225,34.163 21.717,34.163 21.209,34.671

## Other copper
Top Layer:
  text "1       / BEAR4 2022 / (C) 9V1LW" at 68.326,65.659 h0.7
Layer 1:
  text "2     / BEAR4 2022 / (C) 9V1LW" at 68.326,65.659 h0.7
Layer 2:
  text "3   / BEAR4 2022 / (C) 9V1LW" at 68.326,65.659 h0.7
Bottom Layer:
  text "4 / BEAR4 2022 / (C) 9V1LW" at 68.326,65.659 h0.7

## Silkscreen, mask and mechanical layers (free items; w line width, h text height)
Top Overlay:
  text "G / CK / DO / DI / CS / 3.3V" at 41.148,56.772 h1.52 r90
  text "GPS" at 79.375,40.259 h1.52 r90
  text "GND / BAL / V+" at 57.785,37.592 h1.52 r90
  text "GND / ONEWIRE / 3.3V" at 45.222,34.153 h1.52 r90
  text "H+ / H-" at 71.501,31.369 h1.52
Bottom Overlay:
  text "RTS / TX / RX / 5V / DTR / GND" at 57.15,67.183 h1.52 r90
  text "RADIO" at 24.765,63.627 h1.52 r90
  text "GND / SDA / SCL / 3.3V" at 35.941,40.003 h1.52 r90
  text "3.3V / SCL / SDA / GND" at 94.105,35.433 h1.52
Top Solder:
  rectangle: 68.199,65.532 75.692,69.723
Bottom Solder:
  rectangle: 68.199,65.532 75.692,69.723
Board Shape:
  lines w0.254: 80.8,35.803 cw(c82.388,35.803) 83.975,35.803 ; 80.8,44.215 ccw(c82.388,44.215) 83.975,44.215 ; 80.8,57.39 cw(c82.388,57.39) 83.975,57.39 83.975,65.8 cw(c82.388,65.8) 80.8,65.8 ; 80.8,65.8 ccw(c75.8,65.8) 75.8,70.8 25.8,70.8 ccw(c25.8,65.8) 20.8,65.8 20.8,35.8 ccw(c25.8,35.8) 25.8,30.8 75.8,30.8 ccw(c75.8,35.8) 80.8,35.8 80.8,65.8 ; 83.975,35.8 ccw(c88.975,35.8) 88.975,30.8 98.975,30.8 ccw(c98.975,35.8) 103.975,35.8 103.975,44.212 ccw(c98.975,44.212) 98.975,49.212 88.975,49.212 ccw(c88.975,44.212) 83.975,44.212 83.975,35.8
V Cut:
  lines w0.254: 80.8,30.8 80.8,70.8 ; 83.975,30.8 83.975,70.8

## Text inside footprints (layer, text, board x,y; h text height)
U1: Mechanical 13 "ANTENNA" at 17.924,44.8 h1.78 r90